# Altium PCB UltraZohm_Analog_BreakoutBoard.PcbDoc
Units mm, origin at the board's own origin, x right, y up, seen from the top; angles counter-clockwise.
Board outline 50 x 80 mm, 2 copper layers (Top Layer, Bottom Layer), stack 0.325 mm thick; 11 components, 51 nets, 203 pads, 14 vias.
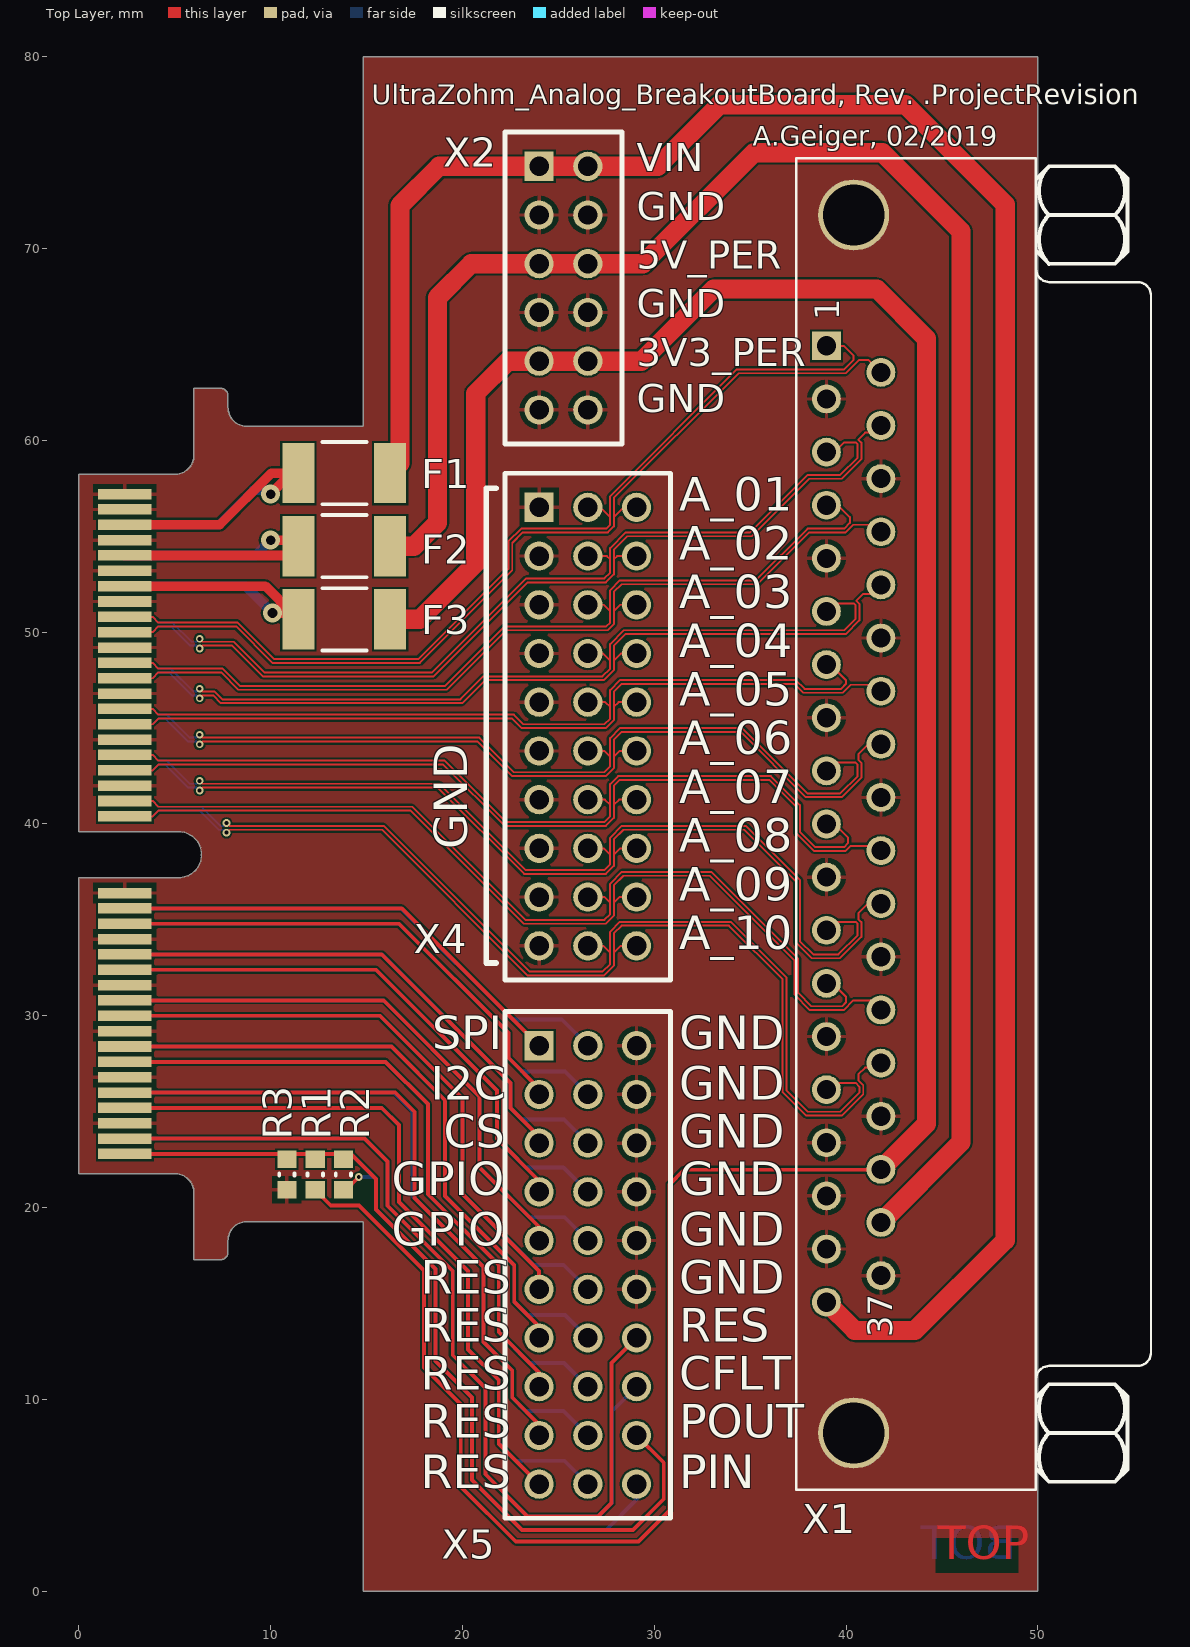
[diagram p0: Top Layer view]
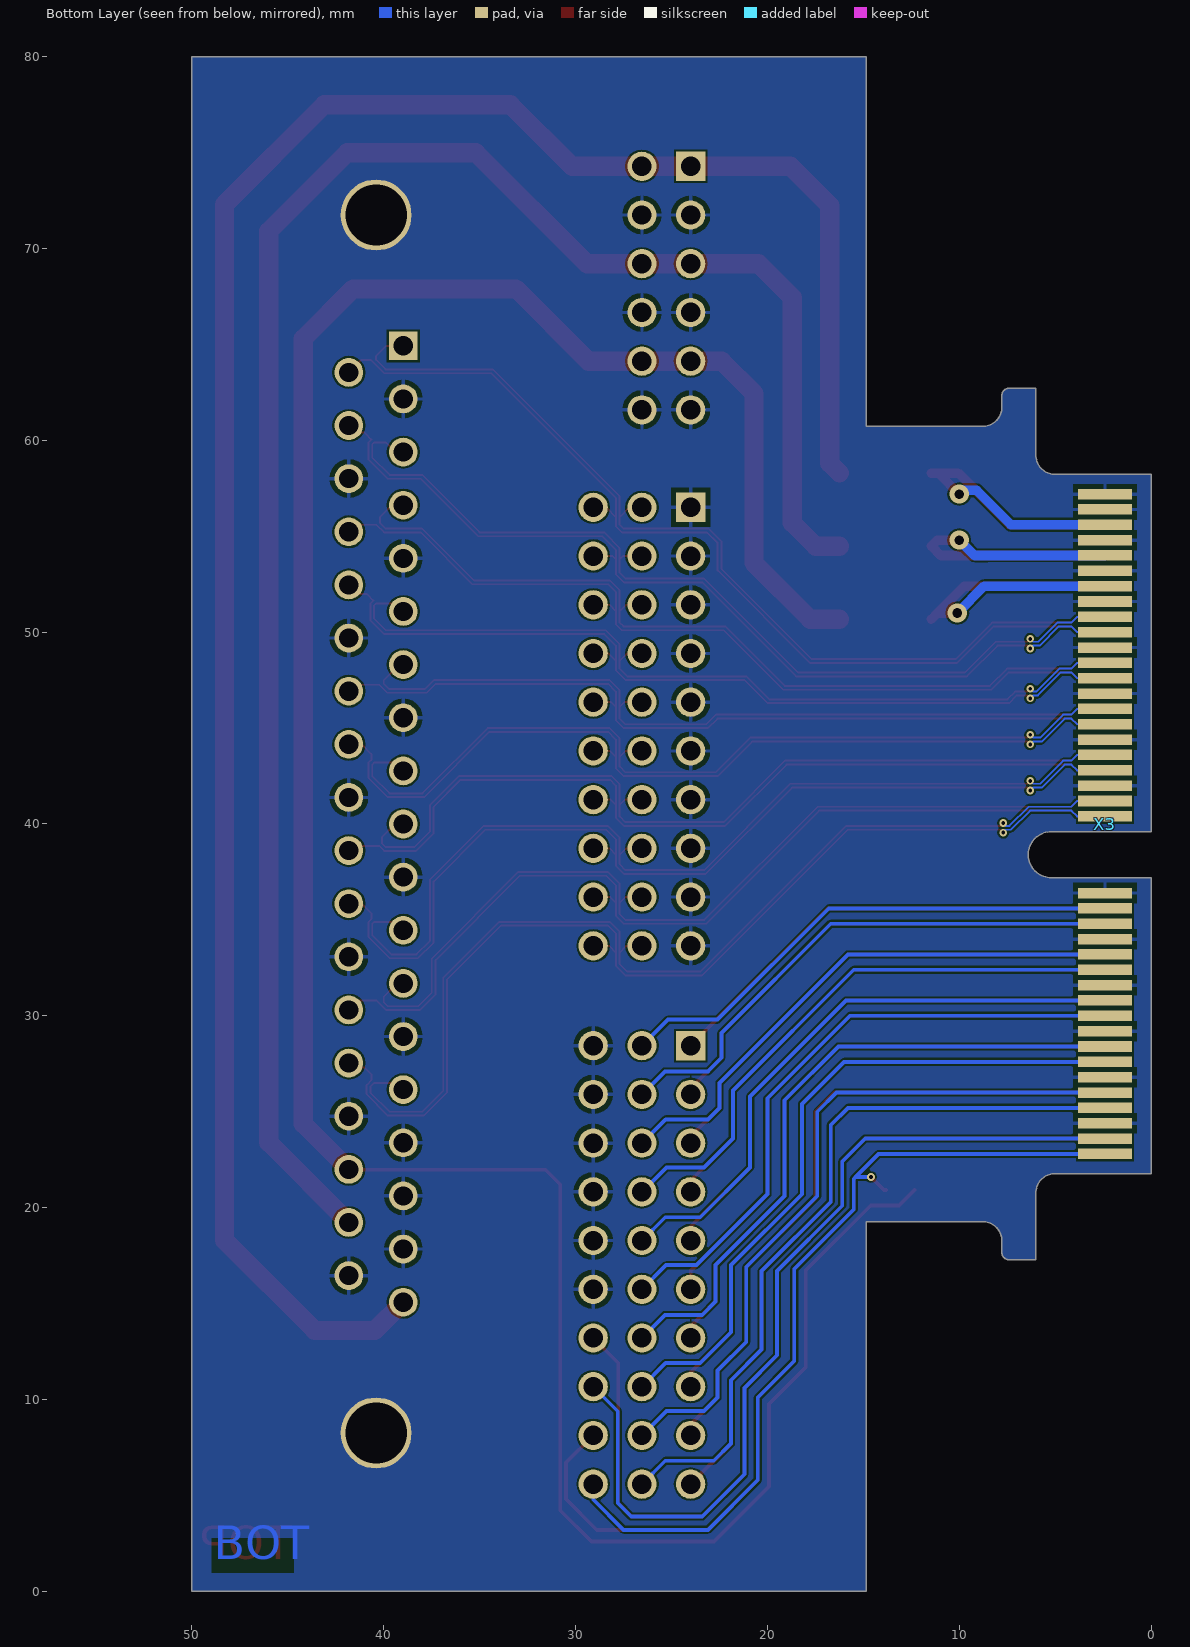
[diagram p1: Bottom Layer view, seen from below]
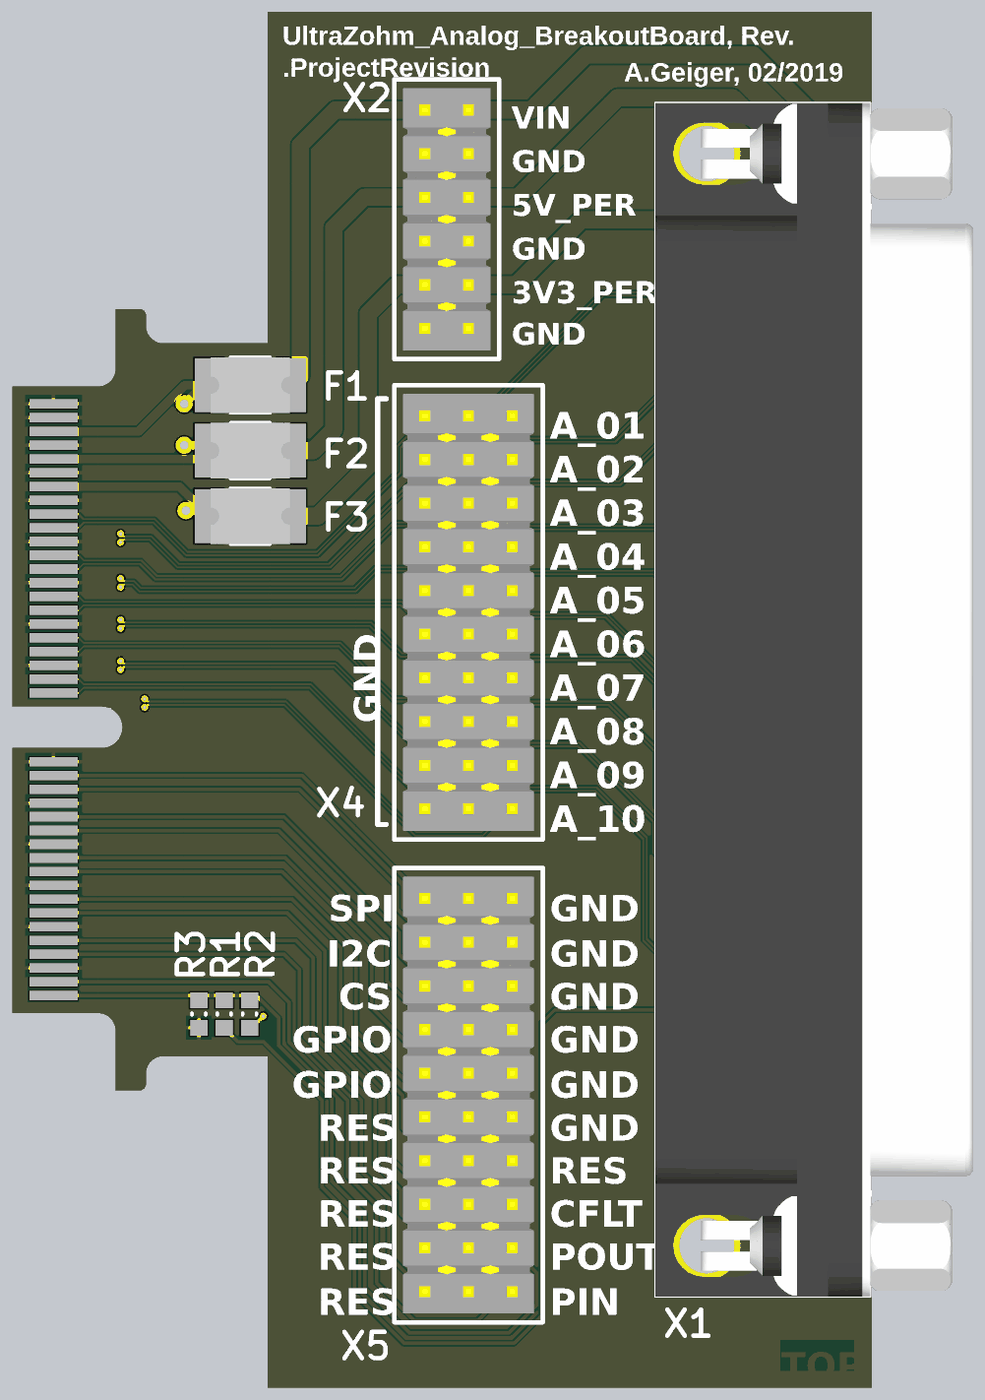
[diagram p2: 3D render of the assembled board from above, using the file's embedded part models]

## Layer stack, top to bottom
Top Solder: solder mask 0.0102, Solder Resist, Dk 3.5
Top Layer: signal copper 0.0356
Dielectric 1: core 0.254, FR-4, Dk 4.2
Bottom Layer: signal copper 0.0356
Bottom Solder: solder mask 0.0102, Solder Resist, Dk 3.5

## Board outline
0,21.775 5,21.775 cw(c5,20.775) 6,20.775 6,17.275 7.38,17.275 ccw(c7.38,17.675) 7.78,17.675 7.78,18.275 cw(c8.78,18.275) 8.78,19.275 14.84,19.275 14.84,0 50,0 50,80 14.84,80 14.84,60.725 8.78,60.725 cw(c8.78,61.725) 7.78,61.725 7.78,62.325 ccw(c7.38,62.325) 7.38,62.725 6,62.725 6,59.225 cw(c5,59.225) 5,58.225 0,58.225 0,39.6 5.2,39.6 cw(c5.2,38.4) 5.2,37.2 0,37.2

## Design rules (kind name [scope] priority, off if disabled: settings)
Clearance [All] p1: gap=0.1
ComponentClearance [All] p1: gap=0.1 collisioncheckmode=3 verticalgap=0.1 showdistances=FALSE
DiffPairsRouting [All] p1: maxlimit=0.12 minlimit=0.12 mostfreqgap=0.12 toplayer_minwidth=0.1 toplayer_maxwidth=0.1 toplayer_prefwidth=0.1 bottomlayer_minwidth=0.1 bottomlayer_maxwidth=0.1 bottomlayer_prefwidth=0.1 maxuncoupledlength=12.7
Height [All] p1: minheight=0 maxheight=50 prefheight=12.7
HoleSize [All] p1: absolutevalues=TRUE maxlimit=4 minlimit=0.025 maxpercent=80.000 minpercent=20.000
PolygonConnect PolygonConnect_Therm [HoleSize > 2.6] p1: connectstyle=Direct reliefconductorwidth=0.254 reliefentries=4 polygonreliefangle="90 Angle" airgapwidth=0.254
PolygonConnect PolygonConnect_via [InPadClass('pad') or IsVia] p2: connectstyle=Direct reliefconductorwidth=0.254 reliefentries=4 polygonreliefangle="90 Angle" airgapwidth=0.254
PolygonConnect [All] p3: connectstyle=Relief reliefconductorwidth=0.2 reliefentries=4 polygonreliefangle="90 Angle" airgapwidth=0.25
RoutingVias [All] p1: holewidth=0.2 width=0.4 viastyle="Through Hole" minholewidth=0.2 minwidth=0.4 maxholewidth=0.5 maxwidth=1
SolderMaskExpansion [All] p1: expansion=0.102
Width [All] p1: maxlimit=10 minlimit=0.1 preferedwidth=0.1
26 further rules are at their usual default settings.

## Classes and differential pairs
differential pair ANL_01: +ANL_01_P -ANL_01_N
differential pair ANL_02: +ANL_02_P -ANL_02_N
differential pair ANL_03: +ANL_03_P -ANL_03_N
differential pair ANL_04: +ANL_04_P -ANL_04_N
differential pair ANL_05: +ANL_05_P -ANL_05_N
differential pair ANL_06: +ANL_06_P -ANL_06_N
differential pair ANL_07: +ANL_07_P -ANL_07_N
differential pair ANL_08: +ANL_08_P -ANL_08_N
differential pair ANL_09: +ANL_09_P -ANL_09_N
differential pair ANL_10: +ANL_10_P -ANL_10_N

## Components (designator, comment, footprint, x,y, rotation, side; value= is the part's Value field where it differs from the comment)
F1 "PTC, 1.1A, 24V" 1812_PTC_Polyfuse_Littelfuse 13.843,58.293 r0 top
F2 "PTC, 1.1A, 24V" 1812_PTC_Polyfuse_Littelfuse 13.843,54.483 r0 top
F3 "PTC, 1.1A, 24V" 1812_PTC_Polyfuse_Littelfuse 13.843,50.673 r0 top
R1 "dnp" R_0603_N 12.325,21.727 r90 top
R2 "0R" R_0603_N 13.801,21.727 r270 top
R3 "dnp" R_0603_N 10.849,21.727 r90 top
X1 "618037231121" 618037231121 40.402,40 r90 top
X2 "TSW-106-07-F-D" TSW-106-XX-XXX-D 25.27,67.94 r270 top
X3 "HSEC8-140-01-XX-DV-A-BL-CARD" HSEC8-140-01-XX-DV-A-BL-CARD 0,40 r90 bottom
X4 "TSW-110-07-F-T" TSW-110-XX-XXX-T 26.54,45.08 r270 top
X5 "TSW-110-07-F-T" TSW-110-XX-XXX-T 26.54,17.013 r270 top

## Footprints (in the part's own frame and the unit in brackets; to place one, negate y for a bottom-side part, rotate by r counter-clockwise, add the part's x,y. Pads: shape width x height; smd on the part's side, far side on the other; paste and mask are expansions set on the pad)
1812_PTC_Polyfuse_Littelfuse [mm] "Chip Fuse, 2-Leads, Body 4.6x3.24mm"
  rect 1.68x3.14 smd: 1(-2.39,0) 2(2.39,0)
  silkscreen extent -1.15,-1.62 1.15,1.62, body extent -2.3,-1.62 2.3,1.62, height 1.15
618037231121 [mm] "37 pins, right angled, 8.08mm, with hex screw"
  rect 1.5x1.5 hole 1: 1(24.93,1.42)
  round 1.5 hole 1: 2(22.16,1.42) 3(19.39,1.42) 4(16.62,1.42) 5(13.85,1.42) 6(11.08,1.42) 7(8.31,1.42) 8(5.54,1.42) 9(2.77,1.42) 10(0,1.42) 11(-2.77,1.42) 12(-5.54,1.42) 13(-8.31,1.42) 14(-11.08,1.42) 15(-13.85,1.42) 16(-16.62,1.42) 17(-19.39,1.42) 18(-22.16,1.42) 19(-24.93,1.42) 20(23.545,-1.42) 21(20.775,-1.42) 22(18.005,-1.42) 23(15.235,-1.42) 24(12.465,-1.42) 25(9.695,-1.42) 26(6.925,-1.42) 27(4.155,-1.42) 28(1.385,-1.42) 29(-1.385,-1.42) 30(-4.155,-1.42) 31(-6.925,-1.42) 32(-9.695,-1.42) 33(-12.465,-1.42) 34(-15.235,-1.42) 35(-18.005,-1.42) 36(-20.775,-1.42) 37(-23.545,-1.42)
  round 3.7 hole 3.2: Z1(-31.75,0) Z2(31.75,0)
  silkscreen extent -34.7,-15.5 34.7,3, body extent -34.7,-15.5 34.7,3, height 12.51
HSEC8-140-01-XX-DV-A-BL-CARD [mm]
  rect 0.55x2.8 smd far side mask+0.05: 1(17.2,2.4) 3(16.4,2.4) 5(15.6,2.4) 7(14.8,2.4) 9(14,2.4) 11(13.2,2.4) 13(12.4,2.4) 15(11.6,2.4) 17(10.8,2.4) 19(10,2.4) 21(9.2,2.4) 23(8.4,2.4) 25(7.6,2.4) 27(6.8,2.4) 29(6,2.4) 31(5.2,2.4) 33(4.4,2.4) 35(3.6,2.4) 37(2.8,2.4) 39(2,2.4) 41(1.2,2.4) 43(0.4,2.4) 45(-3.6,2.4) 47(-4.4,2.4) 49(-5.2,2.4) 51(-6,2.4) 53(-6.8,2.4) 55(-7.6,2.4) 57(-8.4,2.4) 59(-9.2,2.4) 61(-10,2.4) 63(-10.8,2.4) 65(-11.6,2.4) 67(-12.4,2.4) 69(-13.2,2.4) 71(-14,2.4) 73(-14.8,2.4) 75(-15.6,2.4) 77(-16.4,2.4) 79(-17.2,2.4)
  rect 0.55x2.8 smd mask+0.05: 2(17.2,2.4) 4(16.4,2.4) 6(15.6,2.4) 8(14.8,2.4) 10(14,2.4) 12(13.2,2.4) 14(12.4,2.4) 16(11.6,2.4) 18(10.8,2.4) 20(10,2.4) 22(9.2,2.4) 24(8.4,2.4) 26(7.6,2.4) 28(6.8,2.4) 30(6,2.4) 32(5.2,2.4) 34(4.4,2.4) 36(3.6,2.4) 38(2.8,2.4) 40(2,2.4) 42(1.2,2.4) 44(0.4,2.4) 46(-3.6,2.4) 48(-4.4,2.4) 50(-5.2,2.4) 52(-6,2.4) 54(-6.8,2.4) 56(-7.6,2.4) 58(-8.4,2.4) 60(-9.2,2.4) 62(-10,2.4) 64(-10.8,2.4) 66(-11.6,2.4) 68(-12.4,2.4) 70(-13.2,2.4) 72(-14,2.4) 74(-14.8,2.4) 76(-15.6,2.4) 78(-16.4,2.4) 80(-17.2,2.4)
R_0603_N [mm] "SMD Resistor, Body 1.6x0.8mm, IPC Medium Density"
  rect 0.9x1 smd: 1(-0.8,0) 2(0.8,0)
  silkscreen extent -0.05,-0.4 0.05,0.4, body extent -0.85,-0.47 0.85,0.47, height 0.6
TSW-106-XX-XXX-D [mil] "Pinheader, 2.54mm Pitch"
  rect 60x60 hole 40 mask+3: 1(-250,-50)
  round 60 hole 40 mask+3: 2(-250,50) 3(-150,-50) 4(-150,50) 5(-50,-50) 6(-50,50) 7(50,-50) 8(50,50) 9(150,-50) 10(150,50) 11(250,-50) 12(250,50)
  silkscreen extent -320,-120 320,120, body extent -300,-100 300,100, height 330
TSW-110-XX-XXX-T [mil] "Pinheader, 2.54mm Pitch"
  rect 60x60 hole 40 mask+3: 1(-450,-100)
  round 60 hole 40 mask+3: 2(-450,0) 3(-450,100) 4(-350,-100) 5(-350,0) 6(-350,100) 7(-250,-100) 8(-250,0) 9(-250,100) 10(-150,-100) 11(-150,0) 12(-150,100) 13(-50,-100) 14(-50,0) 15(-50,100) 16(50,-100) 17(50,0) 18(50,100) 19(150,-100) 20(150,0) 21(150,100) 22(250,-100) 23(250,0) 24(250,100) 25(350,-100) 26(350,0) 27(350,100) 28(450,-100) 29(450,0) 30(450,100)
  silkscreen extent -520,-170 520,170, body extent -500,-150 500,150, height 330

## Part data
F1 F2 F3: library part Littelfuse_PTC_1812, "Resettable PTC Polyfuse SMD, 1812, automotive"
R1 R2 R3: library part R_0603, "SMD Resistor 0603"
X1: library part "WE-D-Sub Connectors 618037231121", "WR-DSUB Female Angled PCB Connector"
X2: library part TSW-106-XX-XXX-D, "Pin Header, 2.54mm"
X3: "Mating Card Layout for HSEC8-140-01-XX-DV-A-BL"
X4 X5: library part TSW-110-XX-XXX-T, "Pin Header, 2.54mm"

## Via types
v1: diameter 0.4, hole 0.2, Top Layer to Bottom Layer, 11 vias
v2: diameter 1, hole 0.5, Top Layer to Bottom Layer, 3 vias

## Nets (pads, with @x,y where several pads share a name; then routed paths per layer and width w, separated by ;. In a path a pad name is that pad's centre, name@x,y a point inside that pad or via, vN(x,y) a via of type N, cw(c..) or ccw(c..) an arc to the next point about the centre after c; other vN are vias at no path point)
3V3_PER: F3.1 X3.13 X3.14 | length 19.1
  Top Layer w0.5: X3.13 9.726,52.4 F3.1@11.126,51 ; v2(10.1,51) F3.1@11.126,51 ; F3.1 F3.1@11.126,51
  Bottom Layer w0.5: X3.14 8.7,52.4 v2(10.1,51)
3V3_PER_FUSED: F3.2 R1.1 X1.35 X2.9 X2.10 | length 146.2
  Top Layer w0.2: R1.1 13.141,20.112 14.609,20.112 18.004,16.716 18.004,11.673 19.911,9.767 19.911,5.457 22.781,2.586 29.177,2.586 30.8,4.209 30.8,21.213 31.563,21.976 41.803,21.976 X1.35
  Top Layer w1: F3.2 17.773,50.673 20.7,53.6 20.7,62.45 22.38,64.13 X2.9 X2.10 29.33,64.13 33.1,67.9 41.6,67.9 44.2,65.3 44.2,24.373 X1.35
5V_PER: F2.1 X3.9 X3.10 | length 18.8
  Top Layer w0.5: X3.9 10.97,54 F2.1 11.136,54.8 v2(10,54.8)
  Bottom Layer w0.5: X3.10 8.5,54 9.2,54 v2(10,54.8)
5V_PER_FUSED: F2.2 X1.36 X2.5 X2.6 | length 100.3
  Top Layer w1: F2.2 17.483,54.483 18.7,55.7 18.7,67.45 20.46,69.21 X2.5 X2.6 29.41,69.21 35.2,75 41.9,75 46,70.9 46,23.403 X1.36
ANL_01_N: X1.20 X3.19 X4.3 | length 50.2
  Top Layer w0.1: X3.19 3.85,50 4.15,50.3 8.2,50.3 10.1,48.4 17.783,48.4 22.6,53.217 22.6,54.65 23.15,55.2 27.583,55.2 27.9,55.517 27.9,56 ; X4.3 28.41,56.51 27.9,56 ; X1.20 41.167,64.2 40.683,64.2 39.983,63.5 34.4,63.5 27.9,57 27.9,56
ANL_01_P: X1.1 X3.17 X4.2 | length 50.3
  Top Layer w0.1: X3.17 3.85,50.8 4.15,50.5 8.283,50.5 10.183,48.6 17.7,48.6 22.4,53.3 22.4,54.733 23.067,55.4 27.5,55.4 27.7,55.6 27.7,56 ; X4.2 27.19,56.51 27.7,56 ; X1.1 39.87,64.93 40.4,64.4 40.4,64.2 39.9,63.7 34.317,63.7 27.7,57.083 27.7,56
ANL_02_N: X1.21 X3.20 X4.6 | length 49
  Top Layer w0.1: v1(6.3,49.15) 6.45,49.3 8,49.3 9.6,47.7 18.5,47.7 23.4,52.6 27.483,52.6 27.9,53.017 27.9,53.8 ; X4.6 28.07,53.97 27.9,53.8 ; X1.21 41.447,60.4 41,60.4 40.641,60.041 40.8,59.883 40.8,59.017 39.783,58 38.083,58 35.083,55 28.6,55 27.9,54.3 27.9,53.8
  Bottom Layer w0.1: X3.20 3.85,50 4.15,50.3 4.8,50.3 5.8,49.3 6.15,49.3 v1(6.3,49.15)
ANL_02_P: X1.3 X3.18 X4.5 | length 48.7
  Top Layer w0.1: v1(6.3,49.65) 6.45,49.5 8.083,49.5 9.683,47.9 18.417,47.9 23.317,52.8 27.4,52.8 27.7,53.1 27.7,53.8 ; X4.5 27.53,53.97 27.7,53.8 ; X1.3 39.4,59.39 39.91,59.9 40.5,59.9 40.6,59.8 40.6,59.1 39.7,58.2 38,58.2 35,55.2 28.517,55.2 27.7,54.383 27.7,53.8
  Bottom Layer w0.1: X3.18 3.85,50.8 4.15,50.5 4.883,50.5 5.883,49.5 6.15,49.5 v1(6.3,49.65)
ANL_03_N: X1.23 X3.25 X4.9 | length 45.9
  Top Layer w0.1: X3.25 3.85,47.6 4.15,47.9 7.417,47.9 8.317,47 19.183,47 22.283,50.1 27.583,50.1 27.9,50.417 27.9,51.1 ; X4.9 28.23,51.43 27.9,51.1 ; X1.23 41.457,55.6 40.383,55.6 39.983,55.2 38.083,55.2 35.383,52.5 28.3,52.5 27.9,52.1 27.9,51.1
ANL_03_P: X1.4 X3.23 X4.8 | length 45.9
  Top Layer w0.1: X3.23 3.85,48.4 4.15,48.1 7.5,48.1 8.4,47.2 19.1,47.2 22.2,50.3 27.5,50.3 27.7,50.5 27.7,51.1 ; X4.8 27.37,51.43 27.7,51.1 ; X1.4 39.58,56.62 40.2,56 40.2,55.7 39.9,55.4 38,55.4 35.3,52.7 28.217,52.7 27.7,52.183 27.7,51.1
ANL_04_N: X1.24 X3.26 X4.12 | length 45.8
  Top Layer w0.1: v1(6.3,46.55) 6.45,46.7 7,46.7 7.4,46.3 19.983,46.3 21.183,47.5 27.383,47.5 27.9,48.017 27.9,48.5 ; X4.12 28.29,48.89 27.9,48.5 ; X1.24 41.357,52 40.9,52 40.541,51.641 40.7,51.483 40.7,50.617 39.983,49.9 28.5,49.9 27.9,49.3 27.9,48.5
  Bottom Layer w0.1: X3.26 3.85,47.6 4.15,47.9 4.7,47.9 5.9,46.7 6.15,46.7 v1(6.3,46.55)
ANL_04_P: X1.6 X3.24 X4.11 | length 45.3
  Top Layer w0.1: v1(6.3,47.05) 6.45,46.9 7.083,46.9 7.483,46.5 19.9,46.5 21.1,47.7 27.3,47.7 27.7,48.1 27.7,48.5 ; X4.11 27.31,48.89 27.7,48.5 ; X1.6 39.402,51.5 40.4,51.5 40.5,51.4 40.5,50.7 39.9,50.1 28.417,50.1 27.7,49.383 27.7,48.5
  Bottom Layer w0.1: X3.24 3.85,48.4 4.15,48.1 4.783,48.1 5.983,46.9 6.15,46.9 v1(6.3,47.05)
ANL_05_N: X1.26 X3.31 X4.15 | length 43.4
  Top Layer w0.1: X3.31 3.85,45.2 4.15,45.5 22.6,45.5 23.1,45 27.483,45 27.9,45.417 27.9,46.1 ; X4.15 28.15,46.35 27.9,46.1 ; X1.26 41.488,47.259 40.241,47.259 39.824,46.841 37.759,46.841 37.3,47.3 28.3,47.3 27.9,46.9 27.9,46.1
ANL_05_P: X1.7 X3.29 X4.14 | length 42.9
  Top Layer w0.1: X3.29 3.85,46 4.15,45.7 22.683,45.7 23.183,45.2 27.4,45.2 27.7,45.5 27.7,46.1 ; X4.14 27.45,46.35 27.7,46.1 ; X1.7 39.19,48.31 40,47.5 40,47.3 39.741,47.041 37.841,47.041 37.383,47.5 28.217,47.5 27.7,46.983 27.7,46.1
ANL_06_N: X1.27 X3.32 X4.18 | length 47.5
  Top Layer w0.1: v1(6.3,44.15) 6.45,44.3 20.8,44.3 22.6,42.5 27.483,42.5 27.9,42.917 27.9,43.5 ; X4.18 28.21,43.81 27.9,43.5 ; X1.27 41.155,44.155 40.641,43.641 40.641,43.341 40.8,43.183 40.8,42.417 39.783,41.4 37.9,41.4 34.5,44.8 28.3,44.8 27.9,44.4 27.9,43.5
  Bottom Layer w0.1: X3.32 3.85,45.2 4.15,45.5 4.5,45.5 5.7,44.3 6.15,44.3 v1(6.3,44.15)
ANL_06_P: X1.9 X3.30 X4.17 | length 47
  Top Layer w0.1: v1(6.3,44.65) 6.45,44.5 20.883,44.5 22.683,42.7 27.4,42.7 27.7,43 27.7,43.5 ; X4.17 27.39,43.81 27.7,43.5 ; X1.9 39.412,43.2 40.5,43.2 40.6,43.1 40.6,42.5 39.7,41.6 37.983,41.6 34.583,45 28.217,45 27.7,44.483 27.7,43.5
  Bottom Layer w0.1: X3.30 3.85,46 4.15,45.7 4.583,45.7 5.783,44.5 6.15,44.5 v1(6.3,44.65)
ANL_07_N: X1.29 X3.37 X4.21 | length 46.7
  Top Layer w0.1: X3.37 3.85,42.8 4.15,43.1 19,43.1 22.2,39.9 27.483,39.9 27.9,40.317 27.9,41 ; X4.21 28.17,41.27 27.9,41 ; X1.29 41.578,38.859 40.241,38.859 39.983,38.6 38.317,38.6 37.4,39.517 37.4,40.9 36,42.3 28.2,42.3 27.9,42 27.9,41
ANL_07_P: X1.10 X3.35 X4.20 | length 46.5
  Top Layer w0.1: X3.35 3.85,43.6 4.15,43.3 19.083,43.3 22.283,40.1 27.4,40.1 27.7,40.4 27.7,41 ; X4.20 27.43,41.27 27.7,41 ; X1.10 39.4,40 40.1,39.3 40.1,39 39.9,38.8 38.4,38.8 37.6,39.6 37.6,40.983 36.083,42.5 28.117,42.5 27.7,42.083 27.7,41
ANL_08_N: X1.30 X3.38 X4.24 | length 51.9
  Top Layer w0.1: v1(6.3,41.75) 6.45,41.9 18.717,41.9 23.217,37.4 27.483,37.4 27.9,37.817 27.9,38.4 ; X4.24 28.23,38.73 27.9,38.4 ; X1.30 41.145,35.845 40.641,35.341 40.641,35.041 40.8,34.883 40.8,34.117 39.683,33 38.217,33 37.4,33.817 37.4,37 34.7,39.7 28.4,39.7 27.9,39.2 27.9,38.4
  Bottom Layer w0.1: X3.38 3.85,42.8 4.15,43.1 4.5,43.1 5.7,41.9 6.15,41.9 v1(6.3,41.75)
ANL_08_P: X1.12 X3.36 X4.23 | length 51.4
  Top Layer w0.1: v1(6.3,42.25) 6.45,42.1 18.8,42.1 23.3,37.6 27.4,37.6 27.7,37.9 27.7,38.4 ; X4.23 27.37,38.73 27.7,38.4 ; X1.12 39.422,34.9 40.5,34.9 40.6,34.8 40.6,34.2 39.6,33.2 38.3,33.2 37.6,33.9 37.6,37.083 34.783,39.9 28.317,39.9 27.7,39.283 27.7,38.4
  Bottom Layer w0.1: X3.36 3.85,43.6 4.15,43.3 4.583,43.3 5.783,42.1 6.15,42.1 v1(6.3,42.25)
ANL_09_N: X1.32 X3.43 X4.27 | length 49.6
  Top Layer w0.1: X3.43 3.85,40.4 4.15,40.7 17.3,40.7 23.2,34.8 27.483,34.8 27.9,35.217 27.9,35.9 ; X4.27 28.19,36.19 27.9,35.9 ; X1.32 41.327,30.8 40.383,30.8 39.883,30.3 38.117,30.3 37.3,31.117 37.3,32.9 32.9,37.3 28.4,37.3 27.9,36.8 27.9,35.9
ANL_09_P: X1.13 X3.41 X4.26 | length 49
  Top Layer w0.1: X3.41 3.85,41.2 4.15,40.9 17.383,40.9 23.283,35 27.4,35 27.7,35.3 27.7,35.9 ; X4.26 27.41,36.19 27.7,35.9 ; X1.13 39.31,31.69 40,31 40,30.7 39.8,30.5 38.2,30.5 37.5,31.2 37.5,32.983 32.983,37.5 28.317,37.5 27.7,36.883 27.7,35.9
ANL_10_N: X1.33 X3.44 X4.30 | length 56.3
  Top Layer w0.1: v1(7.7,39.55) 7.85,39.7 15.817,39.7 23.417,32.1 27.383,32.1 27.9,32.617 27.9,33.3 ; X4.30 28.25,33.65 27.9,33.3 ; X1.33 41.587,27.3 41,27.3 40.641,26.941 40.641,26.641 40.9,26.383 40.9,25.917 39.783,24.8 37.917,24.8 36.7,26.017 36.7,31.9 33.9,34.7 28.3,34.7 27.9,34.3 27.9,33.3
  Bottom Layer w0.1: X3.44 3.85,40.4 4.15,40.7 6.3,40.7 7.3,39.7 7.6,39.7 7.7,39.6 v1(7.7,39.55)
ANL_10_P: X1.15 X3.42 X4.29 | length 55.7
  Top Layer w0.1: v1(7.7,40.05) 7.85,39.9 15.9,39.9 23.5,32.3 27.3,32.3 27.7,32.7 27.7,33.3 ; X4.29 27.35,33.65 27.7,33.3 ; X1.15 39.332,26.5 40.5,26.5 40.7,26.3 40.7,26 39.7,25 38,25 36.9,26.1 36.9,31.983 33.983,34.9 28.217,34.9 27.7,34.383 27.7,33.3
  Bottom Layer w0.1: X3.42 3.85,41.2 4.15,40.9 6.383,40.9 7.383,39.9 7.6,39.9 7.7,40 v1(7.7,40.05)
ANL_RES_01: X3.60 X5.14 | length 31.5
  Bottom Layer w0.2: X3.60 15.9,30.8 20.9,25.8 20.9,22.1 23.5,19.5 25.323,19.5 X5.14
ANL_RES_02: X3.61 X5.16 | length 31
  Top Layer w0.2: X3.61 15.7,30 20,25.7 20,20.705 24,16.705 X5.16
ANL_RES_03: X3.62 X5.17 | length 33
  Bottom Layer w0.2: X3.62 15.7,30 20,25.7 20,20.705 23.705,17 25.283,17 X5.17
ANL_RES_04: X3.65 X5.19 | length 32.3
  Top Layer w0.2: X3.65 16.3,28.4 19.1,25.6 19.1,20.6 22.7,17 22.7,15.1 24,13.8 X5.19
ANL_RES_05: X3.66 X5.20 | length 34.5
  Bottom Layer w0.2: X3.66 16.3,28.4 19.1,25.6 19.1,20.6 22.7,17 22.7,15.1 23.4,14.4 25.343,14.4 X5.20
ANL_RES_06: X3.67 X5.22 | length 33.9
  Top Layer w0.2: X3.67 16,27.6 18.2,25.4 18.2,20.7 21.9,17 21.9,13.5 24,11.4 X5.22
ANL_RES_07: X3.68 X5.23 | length 36
  Bottom Layer w0.2: X3.68 16,27.6 18.2,25.4 18.2,20.7 21.9,17 21.9,13.5 23.5,11.9 25.303,11.9 X5.23
ANL_RES_08: X3.71 X5.25 | length 35.1
  Top Layer w0.2: X3.71 16.5,26 17.5,25 17.5,20.5 21.1,16.9 21.1,13 22.6,11.5 22.6,10.1 24,8.7 X5.25
ANL_RES_09: X3.72 X5.26 | length 37.2
  Bottom Layer w0.2: X3.72 16.4,26 17.4,25 17.4,20.6 21.1,16.9 21.1,13 22.6,11.5 22.6,10.1 23.3,9.4 25.263,9.4 X5.26
ANL_RES_10: X3.73 X5.28 | length 36.4
  Top Layer w0.2: X3.73 15.8,25.2 16.7,24.3 16.7,20.3 20.3,16.7 20.3,12.6 21.9,11 21.9,7.683 X5.28
ANL_RES_11: X3.74 X5.29 | length 38.9
  Bottom Layer w0.2: X3.74 15.8,25.2 16.7,24.3 16.7,20.3 20.3,16.7 20.3,12.6 21.9,11 21.9,7.7 22.8,6.8 25.323,6.8 X5.29
ANL_RES_12: X3.77 X5.21 | length 49.5
  Top Layer w0.2: X3.77 14.9,23.6 16.1,22.4 16.1,20.1 19.5,16.7 19.5,12.3 21.2,10.6 21.2,6.1 23.4,3.9 27.077,3.9 27.777,4.6 27.777,11.9 X5.21
COLLECTIVE_FLT: X3.78 X5.24 | length 47
  Bottom Layer w0.2: X3.78 14.9,23.6 16.1,22.4 16.1,20.1 19.5,16.7 19.5,12.3 21.2,10.6 21.2,6.1 23.4,3.9 27.1,3.9 27.8,4.6 27.8,9.383 X5.24
CS_FASTADC: X3.54 X5.8 | length 29
  Bottom Layer w0.2: X3.54 15.8,33.2 22.5,26.5 22.5,25.2 23.1,24.6 25.303,24.6 X5.8
GND: R3.1 X1.2 X1.5 X1.8 X1.11 X1.14 X1.16 X1.17 X1.18 X1.22 X1.25 X1.28 X1.31 X1.34 X1.37 X1.Z1 X1.Z2 X2.3 X2.4 X2.7 X2.8 X2.11 X2.12 X3.1 X3.2 X3.3 X3.4 X3.7 X3.8 X3.11 X3.12 X3.15 X3.16 X3.21 X3.22 X3.27 X3.28 X3.33 X3.34 X3.39 X3.40 X3.45 X3.46 X3.51 X3.52 X3.57 X3.58 X3.63 X3.64 X3.69 X3.70 X3.75 X3.76 X4.1 X4.4 X4.7 X4.10 X4.13 X4.16 X4.19 X4.22 X4.25 X4.28 X5.3 X5.6 X5.9 X5.12 X5.15 X5.18
I2C_SHARED_SCL: X3.49 X5.4 | length 26.2
  Top Layer w0.2: X3.49 16.7,34.8 22.4,29.1 22.4,27.811 24,26.211 X5.4
I2C_SHARED_SDA: X3.50 X5.5 | length 28.6
  Bottom Layer w0.2: X3.50 16.7,34.8 22.4,29.1 22.4,27.811 23.1,27.111 23.1,27.1 25.343,27.1 X5.5
PILOT_IN: R2.2 X3.80 X5.30 | length 44.4
  Top Layer w0.2: R2.2 13.927,20.927 v1(14.6,21.6)
  Bottom Layer w0.2: X3.80 14.2,22.8 15.4,21.6 ; v1(14.6,21.6) 15.4,21.6 ; X5.30 29.08,4.78 27.5,3.2 23.1,3.2 20.5,5.8 20.5,10.1 18.6,12 18.6,16.8 15.5,19.9 15.5,21.5 15.4,21.6
PILOT_OUT: R1.2 R2.1 R3.2 X3.79 X5.27 | length 47.1
  Top Layer w0.2: X3.79 14.2,22.8 15.5,21.5 15.5,19.9 18.6,16.8 18.6,12 20.5,10.1 20.5,5.8 23.1,3.2 28.9,3.2 30.5,4.8 30.5,6.703 X5.27
PL_ANL_GPIO_01: X3.55 X5.10 | length 28.2
  Top Layer w0.2: X3.55 15.5,32.4 21.8,26.1 21.8,23.6 24,21.4 X5.10
PS_ANL_GPIO_01: X3.56 X5.11 | length 30.4
  Bottom Layer w0.2: X3.56 15.5,32.4 21.8,26.1 21.8,23.6 23.3,22.1 25.263,22.1 X5.11
PS_ANL_GPIO_02: X3.59 X5.13 | length 29.4
  Top Layer w0.2: X3.59 15.9,30.8 20.9,25.8 20.9,22.1 24,19 X5.13
SPI_SHARED_CLK: X3.48 X5.2 | length 27.1
  Bottom Layer w0.2: X3.48 16.8,35.6 22.6,29.8 25.183,29.8 X5.2
SPI_SHARED_CS: X3.53 X5.7 | length 26.6
  Top Layer w0.2: X3.53 15.8,33.2 22.5,26.5 22.5,25.2 24,23.7 X5.7
SPI_SHARED_MOSI: X3.47 X5.1 | length 24.6
  Top Layer w0.2: X3.47 16.843,35.6 X5.1
VIN: F1.1 X3.5 X3.6 | length 20.1
  Top Layer w0.5: X3.5 7.35,55.6 10.043,58.293 F1.1@11.093,58.293 ; v2(10,57.2) F1.1@11.093,58.293 ; F1.1 F1.1@11.093,58.293
  Bottom Layer w0.5: X3.6 7.3,55.6 9.1,57.4 9.8,57.4 v2(10,57.2)
VIN_FUSED: F1.2 X1.19 X2.1 X2.2 | length 115.9
  Top Layer w1: F1.2 16.75,58.81 16.75,72.25 18.79,74.29 X2.1 X2.2 30.19,74.29 33.4,77.5 43.1,77.5 48.3,72.3 48.3,18.3 43.6,13.6 40.452,13.6 X1.19

## Polygon pours and split planes (outlines as drawn)
GND on Top Layer "GND_Top_Plane" (solid, pour order 2): 0,21.775 5,21.775 cw(c5,20.775) 6,20.775 6,17.275 7.38,17.275 ccw(c7.38,17.675) 7.78,17.675 7.78,18.275 cw(c8.78,18.275) 8.78,19.275 14.84,19.275 14.84,0 50,0 50,80 14.84,80 14.84,60.725 8.78,60.725 cw(c8.78,61.725) 7.78,61.725 7.78,62.325 ccw(c7.38,62.325) 7.38,62.725 6,62.725 6,59.225 cw(c5,59.225) 5,58.225 0,58.225 0,39.6 5.2,39.6 cw(c5.2,38.4) 5.2,37.2 0,37.2
GND on Bottom Layer "GND_Bot_Plane" (solid, pour order 3): 0,21.775 5,21.775 cw(c5,20.775) 6,20.775 6,17.275 7.38,17.275 ccw(c7.38,17.675) 7.78,17.675 7.78,18.275 cw(c8.78,18.275) 8.78,19.275 14.84,19.275 14.84,0 50,0 50,80 14.84,80 14.84,60.725 8.78,60.725 cw(c8.78,61.725) 7.78,61.725 7.78,62.325 ccw(c7.38,62.325) 7.38,62.725 6,62.725 6,59.225 cw(c5,59.225) 5,58.225 0,58.225 0,39.6 5.2,39.6 cw(c5.2,38.4) 5.2,37.2 0,37.2

## Other copper
Top Layer:
  text "TOP" at 44.775,1.095 h3
Bottom Layer:
  text "BOT" at 48.872,1.093 h3

## Silkscreen, mask and mechanical layers (free items; w line width, h text height)
Top Overlay:
  lines w0.3: 21.75,32.75 21.25,32.75 21.25,57.5 21.75,57.5
  text "UltraZohm_Analog_BreakoutBoard, Rev. .ProjectRevision" at 15.265,77.179 h1.75
  text "A.Geiger, 02/2019" at 35.128,75.032 h1.75
  text "VIN" at 29.087,73.533 h2.5
  text "GND" at 29.089,70.993 h2.5
  text "5V_PER" at 29.089,68.453 h2.5
  text "GND" at 29.089,65.913 h2.5
  text "3V3_PER" at 29.089,63.373 h2.5
  text "GND" at 29.089,60.96 h2.5
  text "A_01" at 31.313,55.753 h3
  text "A_02" at 31.313,53.213 h3
  text "A_03" at 31.313,50.673 h3
  text "A_04" at 31.313,48.133 h3
  text "A_05" at 31.313,45.593 h3
  text "A_06" at 31.313,43.053 h3
  text "A_07" at 31.313,40.513 h3
  text "GND" at 20.837,38.696 h3 r90
  text "A_08" at 31.313,37.973 h3
  text "A_09" at 31.313,35.433 h3
  text "A_10" at 31.313,32.893 h3
  text "SPI" at 18.44,27.686 h3
  text "GND" at 31.313,27.686 h3
  text "I2C" at 18.343,25.059 h3
  text "GND" at 31.313,25.059 h3
  text "CS" at 19.026,22.559 h3
  text "GND" at 31.313,22.559 h3
  text "GPIO" at 16.313,20.059 h3
  text "GND" at 31.313,20.059 h3
  text "GPIO" at 16.313,17.432 h3
  text "GND" at 31.313,17.432 h3
  text "RES" at 17.818,14.932 h3
  text "GND" at 31.313,14.932 h3
  text "RES" at 17.818,12.432 h3
  text "RES" at 31.313,12.432 h3
  text "RES" at 17.818,9.932 h3
  text "CFLT" at 31.313,9.932 h3
  text "RES" at 17.818,7.432 h3
  text "POUT" at 31.313,7.432 h3
  text "RES" at 17.818,4.805 h3
  text "PIN" at 31.313,4.805 h3
Mechanical 1:
  lines w0.2: 14.84,19.275 14.84,0 50,0 50,80 14.84,80 14.84,60.725

## Text inside footprints (layer, text, board x,y; h text height)
X1: Top Overlay "1" at 39.652,66.25 h1.27 r90; Top Overlay "37" at 42.402,13.25 h1.27 r90